# Altium PCB EEG_SHIELD.PcbDoc
Units mil, origin at the board's own origin, x right, y up, seen from the top; angles counter-clockwise.
Board outline 2700 x 2100 mil, 2 copper layers (Top Layer, Bottom Layer); 97 components, 89 nets, 307 pads, 0 vias.
Unrouted connection lines stored in the file: 215.
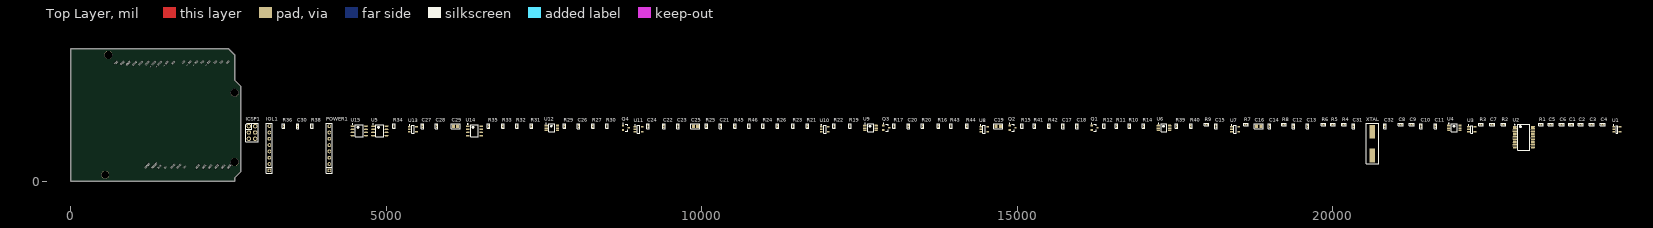
[diagram p0: Top Layer view]
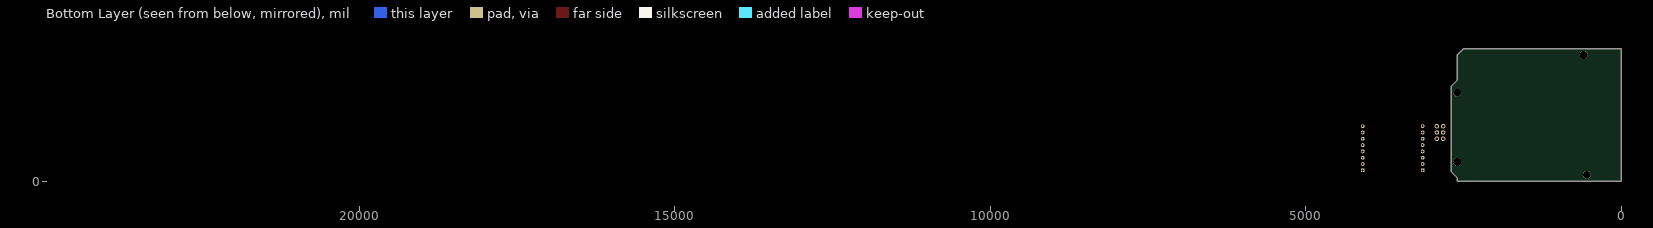
[diagram p1: Bottom Layer view, seen from below]

## Layer stack, top to bottom
Top Solder: solder mask 0.4, Solder Resist, Dk 3.5
Top Layer: signal copper 1.4
Dielectric1: dielectric 12.6, FR-4, Dk 4.8
Bottom Layer: signal copper 1.4
Bottom Solder: solder mask 0.4, Solder Resist, Dk 3.5

## Board outline
0,0 0,2100 2500,2100 2600,2000 2600,1600 2700,1500 2700,150 2600,50 2600,0

## Design rules (kind name [scope] priority, off if disabled: settings)
Clearance [All] p1: gap=10 ignorepadtopadclearanceinfootprint=FALSE except(0: Arc-Hole Track-Hole SMDPad-Hole THPad-Hole Via-Hole Fill-Hole Poly-Hole Region-Hole Text-Hole)
PolygonConnect [All] p1: connectstyle=Relief reliefconductorwidth=10 reliefentries=4 polygonreliefangle="90 Angle" airgapwidth=10
RoomDefinition SENSING [InComponentClass('SENSING')] p1: confinementstyle=ConfineOut formatcopy=TRUE lockcomponents=FALSE outline 2745,-35 3335,-35 3335,430 2745,430
RoutingVias [All] p1: holewidth=28 width=50 viastyle="Through Hole" minholewidth=28 minwidth=50 maxholewidth=28 maxwidth=50
SilkToSolderMaskClearance SilkscreenOverComponentPads [IsPad] p1: minsilkscreentomaskgap=10 clearancetoexposedcopper=TRUE
SolderMaskExpansion [All] p1: expansion=4
Width [All] p1: maxlimit=10 minlimit=10 preferedwidth=10
29 further rules are at their usual default settings.

## Components (designator, comment, footprint, x,y, rotation, side; value= is the part's Value field where it differs from the comment)
C1 "100nF" C0402 23775,895 r0 top
C2 "1uF" C0402 23925,895 r0 top
C3 "100nF" C0402 24100,895 r0 top
C4 "1uF" C0402 24275,895 r0 top
C5 "100nF" C0402 23450,895 r0 top
C6 "100nF" C0402 23625,895 r0 top
C7 "1uF" C0402 22525,895 r0 top
C8 "100nF" C0402 21075,895 r0 top
C9 "1uF" C0402 21250,895 r0 top
C10 "100nF" C0402 21400,870 r90 top
C11 "1uF" C0402 21625,870 r90 top
C12 "100nF" C0402 19375,870 r90 top
C13 "100nF" C0402 19600,870 r90 top
C14 "100nF" C0402 19000,870 r90 top
C15 "1uF" C0402 18150,870 r90 top
C16 "22uF" C0805 18825,870 r0 top
C17 "100nF" C0402 15725,870 r90 top
C18 "100nF" C0402 15950,870 r90 top
C19 "22uF" C0805 14700,870 r0 top
C20 "1uF" C0402 13275,870 r90 top
C21 "1uF" C0402 10300,870 r90 top
C22 "100nF" C0402 9400,870 r90 top
C23 "100nF" C0402 9625,870 r90 top
C24 "1uF" C0402 9150,870 r90 top
C25 "22uF" C0805 9900,870 r0 top
C26 "1uF" C0402 8050,870 r90 top
C27 "100nF" C0402 5575,870 r90 top
C28 "100nF" C0402 5800,870 r90 top
C29 "22uF" C0805 6100,870 r0 top
C30 "1uF" C0402 3600,870 r90 top
C31 "18pF" C0402 20325,870 r90 top
C32 "18pF" C0402 20825,870 r90 top
ICSP1 "ICSP" ICSP 2825,870 r0 top
IOL1 "IOL" "Header 8x1 8.5mm" 3150,170 r90 top
POWER1 "POWER_UNO" "Header 8x1 8.5mm" 4100,170 r90 top
Q1 "BSS138-7-F" SOT23-3 16225,845 r0 top
Q2 "BSS138-7-F" SOT23-3 14925,845 r0 top
Q3 "BSS138-7-F" SOT23-3 12925,845 r0 top
Q4 "BSS138-7-F" SOT23-3 8800,845 r0 top
R1 "100k" R0402 23300,895 r0 top
R2 "1k" R0402 22700,895 r0 top
R3 "100k" R0402 22350,895 r0 top
R4 "2k" R0402 20175,895 r0 top
R5 "330k" R0402 20000,895 r0 top
R6 "330k" R0402 19850,895 r0 top
R7 "1k" R0402 18625,895 r0 top
R8 "1M" R0402 19225,895 r0 top
R9 "100k" R0402 18000,895 r0 top
R10 "2k" R0402 16775,870 r90 top
R11 "330k" R0402 16575,870 r90 top
R12 "330k" R0402 16375,870 r90 top
R14 "1M" R0402 17000,870 r90 top
R15 "1M" R0402 15075,870 r90 top
R16 "1k" R0402 13750,870 r90 top
R17 "100k" R0402 13050,870 r90 top
R19 "2k" R0402 12350,870 r90 top
R20 "1M" R0402 13500,870 r90 top
R21 "330k" R0402 11675,870 r90 top
R22 "100k" R0402 12100,870 r90 top
R23 "330k" R0402 11450,870 r90 top
R24 "330k" R0402 10975,870 r90 top
R25 "100k" R0402 10075,870 r90 top
R26 "1M" R0402 11200,870 r90 top
R27 "1k" R0402 8275,870 r90 top
R29 "100k" R0402 7825,870 r90 top
R30 "1M" R0402 8500,870 r90 top
R31 "2k" R0402 7300,870 r90 top
R32 "330k" R0402 7075,870 r90 top
R33 "330k" R0402 6850,870 r90 top
R34 "100k" R0402 5125,870 r90 top
R35 "1M" R0402 6625,870 r90 top
R36 "100k" R0402 3375,870 r90 top
R38 "1M" R0402 3825,870 r90 top
R39 "10k" R0402 17525,870 r90 top
R40 "10k" R0402 17750,870 r90 top
R41 "10k" R0402 15275,870 r90 top
R42 "10k" R0402 15500,870 r90 top
R43 "10k" R0402 13950,870 r90 top
R44 "10k" R0402 14200,870 r90 top
R45 "10k" R0402 10525,870 r90 top
R46 "10k" R0402 10750,870 r90 top
U1 "NCP551SN30T1G" TSOP-5 24500,820 r0 top
U2 "MCP3912A1-E/SS" SSOP-28 23025,695 r0 top
U3 "NCP551SN30T1G" TSOP-5 22200,820 r0 top
U4 "AD8237ARMZ-R7" MSOP-8 21925,845 r0 top
U5 "LM7332MAX/NOPB" 8-SOIC 4900,795 r0 top
U6 "AD8237ARMZ-R7" MSOP-8 17325,845 r0 top
U7 "MCP6V31T-E/OT" SOT23-5 18450,820 r0 top
U8 "MCP6V31T-E/OT" SOT23-5 14475,820 r0 top
U9 "AD8237ARMZ-R7" MSOP-8 12675,845 r0 top
U10 "MCP6V31T-E/OT" SOT23-5 11950,820 r0 top
U11 "MCP6V31T-E/OT" SOT23-5 9000,820 r0 top
U12 "AD8237ARMZ-R7" MSOP-8 7625,845 r0 top
U13 "MCP6V31T-E/OT" SOT23-5 5425,820 r0 top
U14 "LM334MX/NOPB" 8-SOIC 6400,795 r0 top
U15 "MCP4011-103E/SN" 8-SOIC 4575,795 r0 top
XTAL "ABLS-4.000MHZ-B2-T" XTAL 20625,595 r90 top

## Footprints (in the part's own frame and the unit in brackets; to place one, negate y for a bottom-side part, rotate by r counter-clockwise, add the part's x,y. Pads: shape width x height; smd on the part's side, far side on the other; paste and mask are expansions set on the pad)
8-SOIC [mm] "SOIC, 8-Leads, Body 4.90x3.90mm, Pitch 1.27mm, IPC Medium Density"
  oval 1.5x0.6 smd: 1(-2.7,1.905) 2(-2.7,0.635) 3(-2.7,-0.635) 4(-2.7,-1.905) 5(2.7,-1.905) 6(2.7,-0.635) 7(2.7,0.635) 8(2.7,1.905)
  silkscreen extent -2.82,-2.45 1.55,2.88, body extent -3,-2.45 3,2.45, height 1.75
C0402 [mm] "Chip Capacitor, 2-Leads, Body 1.00x0.50mm, IPC Medium Density"
  rect 0.66x0.62 smd: 1(-0.44,0) 2(0.44,0)
  silkscreen extent -1,-0.5 1,0.5, body extent -0.53,-0.28 0.53,0.28, height 0.55
C0805 [mm] "Chip Capacitor, 2-Leads, Body 2.00x1.25mm, IPC Medium Density"
  rect 1.2x1.4 smd: 1(-0.85,0) 2(0.85,0)
  silkscreen extent -1.78,-0.98 1.82,1.02, body extent -1.05,-0.63 1.05,0.63, height 1.35
"Header 8x1 8.5mm" [mil] "Stackable 8 pin header"
  rect 60x60 hole 30: 1(0,0)
  round 60 hole 30: 2(100,0) 3(200,0) 4(300,0) 5(400,0) 6(500,0) 7(600,0) 8(700,0)
  silkscreen extent -50,-50 750,50, body extent -50,-50 750,50, height 335
ICSP [mil]
  round 70 hole 35.43: 1(0,0) 2(100,0) 3(0,-100) 4(100,-100) 5(0,-200) 6(100,-200)
  silkscreen extent -50,-250 150,50, body extent -50,-250 150,50, height 485
MSOP-8 [mm] "TSOP, 8-Leads, Body 3.00x3.00mm, Pitch 0.65mm, IPC Medium Density"
  oval 1.35x0.5 smd: 1(-2.275,0.975) 2(-2.275,0.325) 3(-2.275,-0.325) 4(-2.275,-0.975) 5(2.275,-0.975) 6(2.275,-0.325) 7(2.275,0.325) 8(2.275,0.975)
  silkscreen extent -2.4,-1.6 1.2,1.9, body extent -2.45,-1.6 2.45,1.6, height 1.1
R0402 [mm] "Chip Resistor, 2-Leads, Body 1.00x0.50mm, IPC Medium Density"
  rect 0.6x0.55 smd: 1(-0.425,0) 2(0.425,0)
  silkscreen extent -0.9,-0.5 0.9,0.5, body extent -0.53,-0.28 0.53,0.28, height 0.4
SOT23-3 [mm] "SOT23, 3-Leads, Body 2.90x2.35mm, Pitch 0.90mm, IPC Medium Density"
  rect 0.95x0.65 smd: 1(-1.175,0.9) 2(-1.175,-0.9) 3(1.175,0)
  silkscreen extent -1.3,-1.5 0.7,1.9, body extent -1.25,-1.5 1.25,1.5, height 1.1
SOT23-5 [mm] "SOT23, 5-Leads, Body 2.90x2.70mm, Pitch 0.95mm, IPC Medium Density"
  rect 1.05x0.6 smd: 1(-1.425,0.95) 2(-1.425,0) 3(-1.425,-0.95) 4(1.425,-0.95) 5(1.425,0.95)
  silkscreen extent -1.55,-1.55 0.5,1.92, body extent -1.6,-1.55 1.6,1.55, height 1.45
SSOP-28 [mm] "SOP, 28-Leads, Body 10.20x5.30mm, Pitch 0.65mm, IPC Medium Density"
  oval 1.65x0.5 smd: 1(-3.625,4.225) 2(-3.625,3.575) 3(-3.625,2.925) 4(-3.625,2.275) 5(-3.625,1.625) 6(-3.625,0.975) 7(-3.625,0.325) 8(-3.625,-0.325) 9(-3.625,-0.975) 10(-3.625,-1.625) 11(-3.625,-2.275) 12(-3.625,-2.925) 13(-3.625,-3.575) 14(-3.625,-4.225) 15(3.625,-4.225) 16(3.625,-3.575) 17(3.625,-2.925) 18(3.625,-2.275) 19(3.625,-1.625) 20(3.625,-0.975) 21(3.625,-0.325) 22(3.625,0.325) 23(3.625,0.975) 24(3.625,1.625) 25(3.625,2.275) 26(3.625,2.925) 27(3.625,3.575) 28(3.625,4.225)
  silkscreen extent -3.75,-5.25 2.4,5.25, body extent -3.9,-5.25 3.9,5.25, height 2
TSOP-5 [mm] "SOT23, 5-Leads, Body 3.00x2.75mm, Pitch 0.95mm, IPC Medium Density"
  rect 1.1x0.6 smd: 1(-1.3,0.95) 2(-1.3,0) 3(-1.3,-0.95) 4(1.3,-0.95) 5(1.3,0.95)
  silkscreen extent -1.42,-1.5 0.35,1.92, body extent -1.5,-1.5 1.5,1.5, height 1.1
XTAL [mm]
  rect 5.6x2.1 smd: 1(-4.75,0) 2(4.75,0)
  silkscreen extent -8.2,-2.5 8.2,2.5, body extent -6.35,-2.35 6.35,2.35, height 3.16

## Part data
C1 C3 C5 C6 C8 C10 C12 C13 C14 C17 C18 C22 C23 C27 C28: library part CL05A104MP5NNNC, "CAP CER 0.1uF 10V X5R 20% SMD 0402 85C Paper T/R", Case/Package=0402, Case Code (Metric)=1005, Dielectric=X5R, Manufacturer=Samsung, Max Operating Temperature=85°C, Min Operating Temperature=-55°C, Supplier Part Number 1=1276-1443-1-ND, Tolerance=20%, Voltage Rating=10V, Capacitance=100nF, Case Code (Imperial)=0402, ComponentLink1Description=https://media.digikey.com/pdf/Data%20Sheets/Samsung%20PDFs/CL_Series_MLCC_ds.pdf, ComponentLink1URL=https://media.digikey.com/pdf/Data%20Sheets/Samsung%20PDFs/CL_Series_MLCC_ds.pdf, Depth=0.5mm, Height=0.5mm, Lead Free="Lead Free", Length=1mm, Manufacturer Part Number=CL05A104MP5NNNC, Mount="Surface Mount", Packaging="Tape and Reel", Pricing 1="1=0.1, 10=0.024, 100=0.0106, 500=0.0076, 1000=0.006, 2500=0.0054, 5000=0.005 (USD)", Radiation Hardening=No, Stock 1=100000, Supplier 1=Digi-Key, Thickness=0.022inch, Voltage Rating (DC)=10V, Width=0.02inch
C2 C4 C7 C9 C11 C15 C20 C21 C24 C26 C30: library part CL05A105MP5NNNC, "CAP CER 1uF 10V X5R 20% SMD 0402 85C Paper T/R", Case/Package=0402, Case Code (Metric)=1005, Dielectric=X5R, Manufacturer=Samsung, Max Operating Temperature=85°C, Min Operating Temperature=-55°C, Package Quantity=1, Supplier Part Number 1=1276-1448-1-ND, Tolerance=20%, Voltage Rating=10V, Capacitance=1uF, Case Code (Imperial)=0402, ComponentLink1Description=https://media.digikey.com/pdf/Data%20Sheets/Samsung%20PDFs/CL_Series_MLCC_ds.pdf, ComponentLink1URL=https://media.digikey.com/pdf/Data%20Sheets/Samsung%20PDFs/CL_Series_MLCC_ds.pdf, Depth=0.5mm, Height=0.5mm, Lead Free="Lead Free", Length=1mm, Manufacturer Part Number=CL05A105MP5NNNC, Mount="Surface Mount", Packaging="Tape and Reel", Pricing 1="1=0.1, 10=0.031, 100=0.014, 500=0.01, 1000=0.0079, 2500=0.0072, 5000=0.0066 (USD)", Radiation Hardening=No, Stock 1=51298, Supplier 1=Digi-Key, Thickness=0.022inch, Voltage Rating (DC)=10V, Width=0.02inch
C16 C19 C25 C29: library part CL21A226KPCLRNC, "CAP CER 22uF 10V X5R 10% SMD 0805 85C Cardboard T/R", Case/Package=0805, Case Code (Metric)=2012, Dielectric=X5R, Manufacturer=Samsung, Max Operating Temperature=85°C, Min Operating Temperature=-55°C, Supplier Part Number 1=1276-6786-1-ND, Tolerance=10%, Voltage Rating=10V, Capacitance=22uF, Case Code (Imperial)=0805, ComponentLink1Description=https://www.verical.com/server-webapp/html/getDatasheet?partID=781772, ComponentLink1URL=https://www.verical.com/server-webapp/html/getDatasheet?partID=781772, Depth=1.25mm, Lead Free="Lead Free", Length=2mm, Manufacturer Part Number=CL21A226KPCLRNC, Mount="Surface Mount", Packaging="Tape and Reel", Pricing 1="1=0.38, 10=0.26, 100=0.1471, 500=0.1039, 1000=0.0909 (USD)", Radiation Hardening=No, Stock 1=40000, Supplier 1=Digi-Key, Thickness=0.037inch, Width=0.049inch
C31 C32: library part CL05C180JB5NNNC, "CAP CER 18pF 50V C0G 5% SMD 0402 125C Paper T/R", Case/Package=0402, Case Code (Metric)=1005, Dielectric=C0G, Manufacturer=Samsung, Max Operating Temperature=125°C, Min Operating Temperature=-55°C, Package Quantity=1, Supplier Part Number 1=1276-1140-1-ND, Temperature Coefficient=300ppm/°C, Tolerance=5%, Voltage=50V, Capacitance=18pF, Case Code (Imperial)=0402, ComponentLink1Description=https://www.verical.com/server-webapp/html/getDatasheet?partID=482699, ComponentLink1URL=https://www.verical.com/server-webapp/html/getDatasheet?partID=482699, ComponentLink2Description=https://www.distrelec.biz/Web/Downloads/_e/ng/MLCC_CatalogDownload2013_ENG.pdf?mime=application%2Fpdf, ComponentLink2URL=https://www.distrelec.biz/Web/Downloads/_e/ng/MLCC_CatalogDownload2013_ENG.pdf?mime=application%2Fpdf, ComponentLink3Description=https://produktinfo.conrad.com/datenblaetter/450000-474999/458675-da-01-en-VS_KONDENSATOR_0402.pdf, ComponentLink3URL=https://produktinfo.conrad.com/datenblaetter/450000-474999/458675-da-01-en-VS_KONDENSATOR_0402.pdf, Contact Plating=Tin, Depth=0.5mm, Height=0.5mm, Length=1mm, Manufacturer Part Number=CL05C180JB5NNNC, Material=Ceramic, Mount="Surface Mount", Packaging="Tape and Reel", Pricing 1="1=0.1, 10=0.033, 100=0.0148, 500=0.0105, 1000=0.0083, 2500=0.0075, 5000=0.0069 (USD)", Radiation Hardening=No, Stock 1=42154, Supplier 1=Digi-Key, Thickness=0.022inch, Voltage Rating=50V, Width=0.02inch
ICSP1: Supplier Part Number 1=2699117, Supplier 1=Arrow, Supplier 2=Arrow, Supplier 3=Digi-Key, Supplier 4=Arrow, Supplier 5=Digi-Key, Supplier Part Number 2=2699116, Supplier Part Number 3=SAM1185-06-ND, Supplier Part Number 4=2699091, Supplier Part Number 5=SAM1196-06-ND
IOL1 POWER1: Supplier Part Number 1=SAM1198-08-ND, Supplier 1=Digi-Key, Supplier 2=Arrow, Supplier 3=Arrow, Supplier 4=Arrow, Supplier Part Number 2=2698939, Supplier Part Number 3=2698940, Supplier Part Number 4=2698925
Q1 Q2 Q3 Q4: "MOSFET N-CH 50V 200MA SOT23-3", Case/Package=SOT-23, Continuous Drain Current (ID)=200mA, Current=2A, Drain to Source Breakdown Voltage=50V, Drain to Source Resistance=3.5R, Gate to Source Voltage (Vgs)=20V, Input Capacitance=50pF, Manufacturer=Diodes, Max Operating Temperature=150°C, Max Power Dissipation=300mW, Min Operating Temperature=-55°C, Package Quantity=3000, Supplier Part Number 1=BSS138-FDICT-ND, Threshold Voltage=1.2V, ComponentLink1Description=http://www.diodes.com/datasheets/BSS138.pdf, ComponentLink1URL=http://www.diodes.com/datasheets/BSS138.pdf, ComponentLink2Description=http://www.farnell.com/datasheets/1915619.pdf, ComponentLink2URL=http://www.farnell.com/datasheets/1915619.pdf, ComponentLink3Description=https://www.diodes.com/assets/Datasheets/ds30144.pdf, ComponentLink3URL=https://www.diodes.com/assets/Datasheets/ds30144.pdf, ComponentLink4Description=http://www.diodes.com/_files/datasheets/ds30144.pdf, ComponentLink4URL=http://www.diodes.com/_files/datasheets/ds30144.pdf, Contact Plating=Matte,Tin, Current Rating=200mA, Drain to Source Voltage (Vdss)=50V, Element Configuration=Single, Fall Time=25ns, Height=1mm, Lead Free="Lead Free", Length=2.9mm, Manufacturer Part Number=BSS138-7-F, Mount="Surface Mount", Nominal Vgs=1.2V, Number of Channels=1, Number of Elements=1, Number of Pins=3, On-State Resistance=3.5R, Packaging="Tape and Reel", Power Dissipation=300mW, Pricing 1="1=0.23, 10=0.212, 100=0.119, 500=0.0637, 1000=0.0433 (USD)", Rds On Max=3.5R, REACH SVHC="No SVHC", Rise Time=10ns, Stock 1=6200, Supplier 1=Digi-Key, Turn-Off Delay Time=20ns, Turn-On Delay Time=20ns, Voltage=50V, Voltage Rating (DC)=50V, Weight=0.000282oz, Width=1.3mm
R1 R3 R9 R17 R22 R25 R29 R34 R36: library part RC0402FR-07100KL, "RES SMD 100K OHM 1% 1/16W 0402", Case/Package=0402, Case Code (Metric)=1005, Manufacturer=Yageo, Max Operating Temperature=155°C, Max Power Dissipation=63mW, Min Operating Temperature=-55°C, Package Quantity=1, Resistance=100kR, Supplier Part Number 1=311-100KLRCT-ND, Temperature Coefficient=100ppm/°C, Tolerance=1%, Voltage Rating=50V, Case Code (Imperial)=0402, ComponentLink1Description=http://www.yageo.com/documents/recent/PYu-RC_Group_51_RoHS_L_9.pdf, ComponentLink1URL=http://www.yageo.com/documents/recent/PYu-RC_Group_51_RoHS_L_9.pdf, ComponentLink2Description=http://www.farnell.com/datasheets/1018594.pdf, ComponentLink2URL=http://www.farnell.com/datasheets/1018594.pdf, ComponentLink3Description=http://www.yageo.com/documents/recent/PYu-RC_Group_51_RoHS_L_8.pdf, ComponentLink3URL=http://www.yageo.com/documents/recent/PYu-RC_Group_51_RoHS_L_8.pdf, ComponentLink4Description=http://documents.rs-components.com/techlib://itc_doclist_GB.htm?stockno=6185797, ComponentLink4URL=http://documents.rs-components.com/techlib://itc_doclist_GB.htm?stockno=6185797, Composition="Thick Film", Depth=0.5mm, Features="Moisture Resistant", Height=0.016inch, Lead Free="Lead Free", Length=0.039inch, Manufacturer Part Number=RC0402FR-07100KL, Military Standard=Not, Number of Terminations=2, Packaging="Tape and Reel", Power Rating=63mW, Pricing 1="1=0.1, 10=0.018, 100=0.0073, 1000=0.0033, 2500=0.0029, 5000=0.0024 (USD)", REACH SVHC="No SVHC", Stock 1=16311362, Supplier 1=Digi-Key, Termination=SMD/SMT, Width=0.02inch, Working Voltage=50V
R2 R7 R16 R27: library part RC0402FR-071KL, "RES SMD 1K OHM 1% 1/16W 0402", Case/Package=0402, Case Code (Metric)=1005, Manufacturer=Yageo, Max Operating Temperature=155°C, Min Operating Temperature=-55°C, Power Rating=62.5mW, Resistance=1kR, Supplier Part Number 1=311-1.00KLRCT-ND, Temperature Coefficient=100ppm/°C, Tolerance=1%, Voltage Rating=50V, Case Code (Imperial)=0402, ComponentLink1Description=http://documents.rs-components.com/techlib://itc_doclist_GB.htm?stockno=6186122, ComponentLink1URL=http://documents.rs-components.com/techlib://itc_doclist_GB.htm?stockno=6186122, ComponentLink2Description=http://www.mouser.com/ds/2/447/PYu-RC0402_51_RoHS_L_6_r-8721.pdf, ComponentLink2URL=http://www.mouser.com/ds/2/447/PYu-RC0402_51_RoHS_L_6_r-8721.pdf, ComponentLink3Description=http://www.yageo.com/documents/recent/PYu-RC0402_51_RoHS_L_6_r.pdf, ComponentLink3URL=http://www.yageo.com/documents/recent/PYu-RC0402_51_RoHS_L_6_r.pdf, ComponentLink4Description=http://www.farnell.com/datasheets/1018594.pdf, ComponentLink4URL=http://www.farnell.com/datasheets/1018594.pdf, Composition="Thick Film", Depth=0.5mm, Height=0.32mm, Lead Free="Lead Free", Length=1mm, Manufacturer Part Number=RC0402FR-071KL, Military Standard=Not, Number of Pins=2, Packaging="Tape and Reel", Pricing 1="1=0.1, 10=0.018, 100=0.0073, 1000=0.0033, 2500=0.0029, 5000=0.0024 (USD)", REACH SVHC=Unknown, Stock 1=121806164, Supplier 1=Digi-Key, Termination=SMD/SMT, Voltage Rating (DC)=50V, Width=0.5mm
R4 R10 R19 R31: library part RC0402FR-072KL, "RES SMD 2K OHM 1% 1/16W 0402", Case/Package=0402, Case Code (Metric)=1005, Manufacturer=Yageo, Max Operating Temperature=155°C, Max Power Dissipation=63mW, Min Operating Temperature=-55°C, Package Quantity=1, Resistance=2kR, Supplier Part Number 1=311-2KLRCT-ND, Temperature Coefficient=100ppm/°C, Tolerance=1%, Voltage Rating=50V, Case Code (Imperial)=0402, ComponentLink1Description=http://www.yageo.com/documents/recent/PYu-RC_Group_51_RoHS_L_9.pdf, ComponentLink1URL=http://www.yageo.com/documents/recent/PYu-RC_Group_51_RoHS_L_9.pdf, ComponentLink2Description=http://documents.rs-components.com/techlib://itc_doclist_GB.htm?stockno=6186510, ComponentLink2URL=http://documents.rs-components.com/techlib://itc_doclist_GB.htm?stockno=6186510, ComponentLink3Description=https://www.verical.com/server-webapp/html/getDatasheet?partID=358921, ComponentLink3URL=https://www.verical.com/server-webapp/html/getDatasheet?partID=358921, ComponentLink4Description=http://www.mouser.com/ds/2/447/PYu-RC0402_51_RoHS_L_6_r-8721.pdf, ComponentLink4URL=http://www.mouser.com/ds/2/447/PYu-RC0402_51_RoHS_L_6_r-8721.pdf, ComponentLink5Description=http://www.farnell.com/datasheets/1018594.pdf, ComponentLink5URL=http://www.farnell.com/datasheets/1018594.pdf, ComponentLink6Description=http://www.farnell.com/datasheets/2167052.pdf, ComponentLink6URL=http://www.farnell.com/datasheets/2167052.pdf, Composition="Thick Film", Depth=0.5mm, Features="Moisture Resistant", Height=0.016inch, Lead Free="Lead Free", Length=1mm, Manufacturer Part Number=RC0402FR-072KL, Military Standard=Not, Number of Terminations=2, Packaging="Tape and Reel", Power Rating=63mW, Pricing 1="1=0.1, 10=0.018, 100=0.0073, 1000=0.0033, 2500=0.0029, 5000=0.0024 (USD)", REACH SVHC=Unknown, Stock 1=11965319, Supplier 1=Digi-Key, Termination=SMD/SMT, Voltage Rating (DC)=50V, Width=0.02inch, Working Voltage=50V
R5 R6 R11 R12 R21 R23 R24 R32 R33: library part RC0402FR-07330KL, "RES SMD 330K OHM 1% 1/16W 0402", Case/Package=0402, Case Code (Metric)=1005, Manufacturer=Yageo, Max Operating Temperature=155°C, Max Power Dissipation=63mW, Min Operating Temperature=-55°C, Package Quantity=1, Resistance=330kR, Supplier Part Number 1=311-330KLRCT-ND, Temperature Coefficient=100ppm/°C, Tolerance=1%, Voltage Rating=50V, Case Code (Imperial)=0402, ComponentLink1Description=http://www.yageo.com/documents/recent/PYu-RC_Group_51_RoHS_L_9.pdf, ComponentLink1URL=http://www.yageo.com/documents/recent/PYu-RC_Group_51_RoHS_L_9.pdf, ComponentLink2Description=http://www.mouser.com/ds/2/447/PYu-RC0402_51_RoHS_L_6_r-8721.pdf, ComponentLink2URL=http://www.mouser.com/ds/2/447/PYu-RC0402_51_RoHS_L_6_r-8721.pdf, ComponentLink3Description=http://www.farnell.com/datasheets/1018594.pdf, ComponentLink3URL=http://www.farnell.com/datasheets/1018594.pdf, ComponentLink4Description=http://www.yageo.com/documents/recent/PYu-RC0402_51_RoHS_L_6_r.pdf, ComponentLink4URL=http://www.yageo.com/documents/recent/PYu-RC0402_51_RoHS_L_6_r.pdf, Composition="Thick Film", Depth=0.5mm, Features="Moisture Resistant", Height=0.016inch, Lead Free="Lead Free", Length=1mm, Manufacturer Part Number=RC0402FR-07330KL, Military Standard=Not, Number of Terminations=2, Packaging="Tape and Reel", Power Rating=63mW, Pricing 1="1=0.1, 10=0.018, 100=0.0073, 1000=0.0033, 2500=0.0029, 5000=0.0024 (USD)", REACH SVHC=Unknown, Stock 1=1854774, Supplier 1=Digi-Key, Termination=SMD/SMT, Width=0.02inch
R8 R14 R15 R20 R26 R30 R35 R38: library part RC0402FR-071ML, "RES SMD 1M OHM 1% 1/16W 0402", Case/Package=0402, Case Code (Metric)=1005, Manufacturer=Yageo, Max Operating Temperature=155°C, Min Operating Temperature=-55°C, Power Rating=63mW, Resistance=1MR, Supplier Part Number 1=311-1.00MLRCT-ND, Temperature Coefficient=100ppm/°C, Tolerance=1%, Voltage Rating=50V, Case Code (Imperial)=0402, ComponentLink1Description=http://www.farnell.com/datasheets/1018594.pdf, ComponentLink1URL=http://www.farnell.com/datasheets/1018594.pdf, ComponentLink2Description=http://www.yageo.com/documents/recent/PYu-RC0402_51_RoHS_L_6_r.pdf, ComponentLink2URL=http://www.yageo.com/documents/recent/PYu-RC0402_51_RoHS_L_6_r.pdf, Composition="Thick Film", Depth=0.5mm, Height=0.32mm, Lead Free="Lead Free", Length=1mm, Manufacturer Part Number=RC0402FR-071ML, Military Standard=Not, Packaging="Tape and Reel", Pricing 1="1=0.1, 10=0.018, 100=0.0073, 1000=0.0033, 2500=0.0029, 5000=0.0024 (USD)", REACH SVHC=Unknown, Stock 1=18919667, Supplier 1=Digi-Key, Termination=SMD/SMT
R39 R40 R41 R42 R43 R44 R45 R46: library part RC0402JR-0710KL, "RES SMD 10K OHM 5% 1/16W 0402", Case/Package=0402, Case Code (Metric)=1005, Manufacturer=Yageo, Max Operating Temperature=155°C, Max Power Dissipation=63mW, Min Operating Temperature=-55°C, Package Quantity=1, Power Rating=62.5mW, Resistance=10kR, Supplier Part Number 1=311-10KJRCT-ND, Temperature Coefficient=100ppm/°C, Tolerance=5%, Voltage Rating=50V, Case Code (Imperial)=0402, Composition="Thick Film", Depth=0.5mm, Features="Moisture Resistant", Height=0.016inch, Lead Free="Lead Free", Length=1mm, Manufacturer Part Number=RC0402JR-0710KL, Military Standard=Not, Number of Terminations=2, Packaging="Tape and Reel", Pricing 1="1=0.1, 10=0.018, 100=0.0073, 1000=0.0033, 2500=0.0029, 5000=0.0024 (USD)", REACH SVHC=Unknown, Stock 1=47303622, Supplier 1=Digi-Key, Termination=SMD/SMT, Width=0.02inch
U1 U3: "LDO 3.0V 150mA CMOS w/Enable", Case/Package=TSOP, Dropout Voltage=40mV, Input Bias Current=4uA, Manufacturer="ON Semiconductor", Max Input Voltage=12V, Max Operating Temperature=85°C, Max Output Current=150mA, Min Input Voltage=0uV, Min Operating Temperature=-40°C, Min Output Voltage=3V, Output Voltage Accuracy=2%, Package Quantity=1, Quiescent Current=8uA, Supplier Part Number 1=NCP551SN30T1GOSCT-ND, Accuracy=2%, ComponentLink1Description=http://www.onsemi.ru.com/pub/Collateral/NCP551-D.PDF, ComponentLink1URL=http://www.onsemi.ru.com/pub/Collateral/NCP551-D.PDF, ComponentLink2Description=http://www.onsemi.com/pub/Collateral/NCP551-D.PDF, ComponentLink2URL=http://www.onsemi.com/pub/Collateral/NCP551-D.PDF, Contact Plating=Matte,Tin, Halogen Free="Halogen Free", Height=1mm, Lead Free="Lead Free", Length=3mm, Manufacturer Part Number=NCP551SN30T1G, Mount="Surface Mount", Nominal Output Voltage=3V, Number of Outputs=1, Number of Pins=5, Number of Regulators=1, Output Current=150mA, Output Type=Fixed, Output Voltage=3V, Packaging="Tape and Reel", Polarity=Positive, Pricing 1="1=0.54, 10=0.46, 100=0.3432, 500=0.2697, 1000=0.2084 (USD)", Radiation Hardening=No, REACH SVHC="No SVHC", Stock 1=9920, Supplier 1=Digi-Key, Width=1.5mm
U2: "IC Analog Front End - AFE 4 Chnl Energy Meter Front End 3V SPI/2", Case/Package=SSOP, Manufacturer=Microchip, Max Operating Temperature=125°C, Max Supply Voltage=3.6V, Min Operating Temperature=-40°C, Min Supply Voltage=2.7V, Package Quantity=47, Supplier Part Number 1=MCP3912A1-E/SS-ND, Height=1.85mm, Interface=Serial,SPI, Lead Free="Lead Free", Length=10.5mm, Manufacturer Part Number=MCP3912A1-E/SS, Mount="Surface Mount", Number of A/D Converters=4, Number of Channels=4, Number of Pins=28, Packaging=Rail/Tube, Pricing 1="1=3.33, 25=2.7708, 100=2.5235 (USD)", REACH SVHC="No SVHC", Resolution=24b, Sampling Rate=125KS/s, Stock 1=156, Supplier 1=Digi-Key, Width=5.6mm
U4 U6 U9 U12: "IC OPAMP INSTR 200KHZ RRO 8MSOP", Case/Package=MSOP, Input Bias Current=250pA, Input Offset Voltage (Vos)=75uV, Manufacturer="Analog Devices", Max Operating Temperature=125°C, Max Supply Voltage=5.5V, Min Operating Temperature=-40°C, Min Supply Voltage=1.8V, Nominal Supply Current=115uA, Output Current per Channel=4mA, Package Quantity=1, Supplier Part Number 1=AD8237ARMZ-R7CT-ND, Voltage Gain=60dB, -3db Bandwidth=200kHz, Bandwidth=20kHz, Common Mode Rejection Ratio=106dB, ComponentLink1Description=http://www.analog.com/media/en/technical-documentation/data-sheets/AD8237.pdf, ComponentLink1URL=http://www.analog.com/media/en/technical-documentation/data-sheets/AD8237.pdf, ComponentLink2Description=http://www.analog.com/static/imported-files/data_sheets/AD8237.pdf, ComponentLink2URL=http://www.analog.com/static/imported-files/data_sheets/AD8237.pdf, Contact Plating=Matte,Tin, Lead Free="Contains Lead", Manufacturer Part Number=AD8237ARMZ-R7, Mount="Surface Mount", Number of Channels=1, Number of Circuits=1, Number of Elements=1, Number of Pins=8, Operating Supply Current=115uA, Packaging="Tape and Reel", Pricing 1="1=2.76, 10=2.476, 100=2.0286, 500=1.7269 (USD)", Slew Rate=0.15V/µs, Stock 1=16545, Supplier 1=Digi-Key
U5: "IC OP AMP R-R I/O DUAL 30V 8SOIC", Case/Package=SOIC, Input Bias Current=1uA, Input Offset Voltage (Vos)=2mV, Manufacturer="TI National Semiconductor", Max Dual Supply Voltage=16V, Max Operating Temperature=125°C, Max Supply Voltage=32V, Min Dual Supply Voltage=1.25V, Min Operating Temperature=-40°C, Min Supply Voltage=2.5V, Nominal Supply Current=2mA, Output Current=70mA, Package Quantity=2500, Power Supply Rejection Ratio (PSRR)=78dB, Supplier Part Number 1=296-35310-1-ND, Voltage Gain=77dB, Common Mode Rejection Ratio=62dB, ComponentLink1Description=http://www.ti.com/lit/ds/symlink/lm7332.pdf, ComponentLink1URL=http://www.ti.com/lit/ds/symlink/lm7332.pdf, Contact Plating=Tin, Gain Bandwidth Product=21MHz, Lead Free="Lead Free", Manufacturer Part Number=LM7332MAX/NOPB, Mount="Surface Mount", Number of Channels=2, Number of Circuits=2, Number of Elements=2, Number of Pins=8, Operating Supply Current=2mA, Operating Supply Voltage=16V, Output Current per Channel=70mA, Packaging="Tape and Reel", Pricing 1="1=2.67, 10=2.402, 100=1.9306, 500=1.5862, 1000=1.3143 (USD)", Radiation Hardening=No, Slew Rate=15.2V/µs, Stock 1=7321, Supplier 1=Digi-Key, Unity Gain Bandwidth Product=19.3MHz
U7 U8 U10 U11 U13: "IC OPAMP ZRO-DRFT 300KHZ SOT23-5", Case/Package=SOT-23, Input Bias Current=5pA, Input Offset Voltage (Vos)=8uV, Manufacturer=Microchip, Max Operating Temperature=125°C, Max Supply Voltage=5.5V, Min Operating Temperature=-40°C, Min Supply Voltage=1.8V, Nominal Supply Current=23uA, Output Current=21mA, Package Quantity=3000, Power Supply Rejection Ratio (PSRR)=120dB, Supplier Part Number 1=MCP6V31T-E/OTCT-ND, Voltage Gain=135dB, Bandwidth=300kHz, Common Mode Rejection Ratio=120dB, ComponentLink1Description=http://ww1.microchip.com/downloads/en/DeviceDoc/25127A.pdf, ComponentLink1URL=http://ww1.microchip.com/downloads/en/DeviceDoc/25127A.pdf, ComponentLink2Description=https://www.distrelec.biz/Web/Downloads/_t/ds/MCP6V31_1U_eng_tds.pdf?mime=application%2Fpdf, ComponentLink2URL=https://www.distrelec.biz/Web/Downloads/_t/ds/MCP6V31_1U_eng_tds.pdf?mime=application%2Fpdf, ComponentLink3Description=https://www.verical.com/server-webapp/html/getDatasheet?partID=762349, ComponentLink3URL=https://www.verical.com/server-webapp/html/getDatasheet?partID=762349, ComponentLink4Description=http://ww1.microchip.com/downloads/jp/DeviceDoc/jp557758.pdf, ComponentLink4URL=http://ww1.microchip.com/downloads/jp/DeviceDoc/jp557758.pdf, ComponentLink5Description=http://www.microchip.com/mymicrochip/filehandler.aspx?ddocname=en557758, ComponentLink5URL=http://www.microchip.com/mymicrochip/filehandler.aspx?ddocname=en557758, ComponentLink6Description=http://www.farnell.com/datasheets/1599560.pdf, ComponentLink6URL=http://www.farnell.com/datasheets/1599560.pdf, Gain Bandwidth Product=300kHz, Height=1.3mm, Lead Free="Lead Free", Length=3.1mm, Manufacturer Part Number=MCP6V31T-E/OT, Number of Amplifiers=1, Number of Channels=1, Number of Circuits=1, Number of Elements=1, Number of Pins=5, Operating Supply Current=23uA, Output Current per Channel=21mA, Packaging="Tape and Reel", Pricing 1="1=1.11, 25=0.9272, 100=0.8446 (USD)", Radiation Hardening=No, REACH SVHC="No SVHC", Slew Rate=0.13V/µs, Stock 1=12497, Supplier 1=Digi-Key, Unity Gain Bandwidth Product=300kHz, Width=1.8mm
U14: "IC CURRENT SOURCE 3% 8SOIC", Case/Package=SOIC, Forward Current=5mA, Forward Voltage=1V, Manufacturer="TI National Semiconductor", Max Input Voltage=40V, Max Operating Temperature=85°C, Max Power Dissipation=400mW, Max Supply Current=10mA, Min Operating Temperature=-40°C, Min Supply Voltage=800mV, Output Voltage=20V, Package Quantity=2500, Quiescent Current=1uA, Supplier Part Number 1=LM334MX/NOPBCT-ND, Accuracy=6%, ComponentLink1Description=https://www.verical.com/server-webapp/html/getDatasheet?partID=629166, ComponentLink1URL=https://www.verical.com/server-webapp/html/getDatasheet?partID=629166, ComponentLink2Description=http://www.ti.com/lit/ds/symlink/lm234.pdf, ComponentLink2URL=http://www.ti.com/lit/ds/symlink/lm234.pdf, ComponentLink3Description=http://www.ti.com/general/docs/lit/getliterature.tsp?genericPartNumber=LM334&&fileType=pdf, ComponentLink3URL=http://www.ti.com/general/docs/lit/getliterature.tsp?genericPartNumber=LM334&&fileType=pdf, ComponentLink4Description=http://www.farnell.com/datasheets/1883087.pdf, ComponentLink4URL=http://www.farnell.com/datasheets/1883087.pdf, Lead Free="Lead Free", Manufacturer Part Number=LM334MX/NOPB, Max Supply Voltage=40V, Min Input Voltage=1V, Mount="Surface Mount", Number of Outputs=1, Number of Pins=8, Output Current=10mA, Output Type=Analog, Packaging="Tape and Reel", Pricing 1="1=0.9, 10=0.802, 100=0.6254, 500=0.5166, 1000=0.4079 (USD)", Radiation Hardening=No, REACH SVHC="No SVHC", Reference Type=Adjustable, Stock 1=58254, Supplier 1=Digi-Key
U15: "IC 10K Digital Potentiometer Single, 2 Wire, Serial,  20%, 1.8 V", Case/Package=SOIC, Manufacturer=Microchip, Max Operating Temperature=125°C, Max Supply Current=45uA, Max Supply Voltage=5.5V, Min Operating Temperature=-40°C, Min Supply Voltage=1.8V, Operating Supply Voltage=5V, Package Quantity=100, Resistance=10kR, Supplier Part Number 1=MCP4011-103E/SN-ND, Temperature Coefficient=150ppm/°C, Tolerance=20%, ComponentLink1Description=http://ww1.microchip.com/downloads/en/DeviceDoc/21978c.pdf, ComponentLink1URL=http://ww1.microchip.com/downloads/en/DeviceDoc/21978c.pdf, ComponentLink2Description=https://www.verical.com/server-webapp/html/getDatasheet?partID=431510, ComponentLink2URL=https://www.verical.com/server-webapp/html/getDatasheet?partID=431510, ComponentLink3Description=http://www.microchip.com/mymicrochip/filehandler.aspx?ddocname=en025230, ComponentLink3URL=http://www.microchip.com/mymicrochip/filehandler.aspx?ddocname=en025230, ComponentLink4Description=http://www.microchip.com/mymicrochip/filehandler.aspx?ddocname=en023833, ComponentLink4URL=http://www.microchip.com/mymicrochip/filehandler.aspx?ddocname=en023833, ComponentLink5Description=https://www.distrelec.biz/Web/Downloads/_t/ds/mcp4011_eng_tds.pdf?mime=application%2Fpdf, ComponentLink5URL=https://www.distrelec.biz/Web/Downloads/_t/ds/mcp4011_eng_tds.pdf?mime=application%2Fpdf, ComponentLink6Description=http://www.farnell.com/datasheets/130143.pdf, ComponentLink6URL=http://www.farnell.com/datasheets/130143.pdf, Contact Plating=Matte,Tin, Height=1.55mm, Interface=2-Wire,Serial, Lead Free="Lead Free", Length=5mm, Manufacturer Part Number=MCP4011-103E/SN, Memory Type=Volatile, Mount="Surface Mount", Nominal Supply Current=45uA, Number of Circuits=1, Number of Elements=1, Number of Pins=8, Number of Positions=64, Number of Taps=64, Packaging=Rail/Tube, Pricing 1="1=0.53, 25=0.4428, 100=0.4017 (USD)", Radiation Hardening=No, REACH SVHC="No SVHC", Stock 1=1448, Supplier 1=Digi-Key, Taper=Linear, Width=3.99mm
XTAL: "4MHz ±20ppm Crystal 18pF 180 Ohm -20°C ~ 70°C  Surface Mount HC49/US", Case/Package=SMD/SMT, ESR (Equivalent Series Resistance)=180R, Frequency=4MHz, Frequency Stability=50ppm, Frequency Tolerance=20ppm, Load Capacitance=18pF, Manufacturer=Abracon, Max Operating Temperature=70°C, Min Operating Temperature=-20°C, Package Quantity=1000, Supplier Part Number 1=535-9085-1-ND, ComponentLink1Description=https://abracon.com/Support/PackageDrawing/Resonators/ABLS-2D.pdf, ComponentLink1URL=https://abracon.com/Support/PackageDrawing/Resonators/ABLS-2D.pdf, ComponentLink2Description=http://www.abracon.com/Resonators/abls.pdf, ComponentLink2URL=http://www.abracon.com/Resonators/abls.pdf, ComponentLink3Description=https://www.verical.com/server-webapp/html/getDatasheet?partID=722412, ComponentLink3URL=https://www.verical.com/server-webapp/html/getDatasheet?partID=722412, ComponentLink4Description=http://www.mouser.com/ds/2/3/abls-44621.pdf, ComponentLink4URL=http://www.mouser.com/ds/2/3/abls-44621.pdf, Depth=4.7mm, Height=0.165inch, Lead Free="Lead Free", Length=11.4mm, Manufacturer Part Number=ABLS-4.000MHZ-B2-T, Mount="Surface Mount", Number of Pins=2, Packaging="Tape and Reel", Pricing 1="1=0.28, 10=0.234, 50=0.2104, 100=0.187, 500=0.1777 (USD)", Radiation Hardening=No, REACH SVHC=Yes, Series Resistance=180R, Stock 1=74308, Supplier 1=Digi-Key, Termination=SMD/SMT, Tolerance=20ppm, Width=0.185inch

## Free pads (board coordinates)
  round 125.98 hole 125.98: 0(550,100) 0(600,2000) 0(2600,300) 0(2600,1400)

## Nets (pads, with @x,y where several pads share a name; then routed paths per layer and width w, separated by ;. In a path a pad name is that pad's centre, name@x,y a point inside that pad or via, vN(x,y) a via of type N, cw(c..) or ccw(c..) an arc to the next point about the centre after c; other vN are vias at no path point)
0_IN+: R5.2 U4.2
0_IN-: R6.2 U4.3
1_IN+: R11.2 U6.2
1_IN-: R12.2 U6.3
2_IN+: R21.2 U9.2
2_IN-: R23.2 U9.3
3_IN+: R32.2 U12.2
3_IN-: R33.2 U12.3
3V3: POWER1.5
5V: ICSP1.2 POWER1.4
+3V: C6.2 C10.2 C11.2 Q1.1 Q2.1 Q3.1 Q4.1 R1.2 R39.2 R41.2 R43.2 R45.2 U2.28 U3.4
+3VA: C3.2 C4.2 C5.2 C12.2 C13.2 C17.2 C18.2 C22.2 C23.2 C27.2 C28.2 R22.2 R34.2 U1.4 U2.1 U4.1 U4.5 U5.8 U6.1 U6.5 U7.5 U8.5 U9.1 U9.5 U10.5 U11.5 U12.1 U12.5 U13.5
+5V: C1.2 C2.2 C8.2 C9.2 R40.2 R42.2 R44.2 R46.2 U1.1 U1.3 U3.1 U3.3 U14.4 U15.1
AD0: 
AD1: 
AD2: 
AD3: 
AD4: 
AD5: 
AGND: C1.1 C2.1 C3.1 C4.1 C5.1 C7.1 C12.1 C13.1 C14.1 C15.1 C17.1 C18.1 C20.1 C21.1 C22.1 C23.1 C26.1 C27.1 C28.1 C30.1 R25.1 R36.1 U1.2 U2.10 U2.11 U2.12 U2.13 U2.15 U2.16 U2.19 U4.4 U5.4 U6.4 U7.2 U8.2 U9.4 U10.2 U11.2 U12.4 U13.2
AREF: 
CH0+: C7.2 R2.2 U2.2
CH1+: C15.2 R7.2 U2.5
CH2+: C20.2 R16.2 U2.6
CH3+: C26.2 R27.2 U2.9
CS_3V: Q4.3 R45.1 U2.23
CS_5V: R46.1
CURRENT_BIAS: R5.1 R6.1 R11.1 R12.1 R21.1 R23.1 R32.1 R33.1 U5.1 U5.2
DRIVEN_GND: C24.2 R24.1
GND: C6.1 C8.1 C9.1 C10.1 C11.1 C31.1 C32.1 ICSP1.6 POWER1.2 POWER1.3 U2.17 U2.20 U3.2 U15.2
IO0: IOL1.1
IO1: IOL1.2
IO2: IOL1.3
IO3: IOL1.4
IO4: IOL1.5
IO5: IOL1.6
IO6: IOL1.7
IO7: IOL1.8
IO8: 
IO9: 
IO10: 
IO11: 
IO12: 
IO13: 
IOREF: POWER1.7
MISO: ICSP1.1
MISO_3V: Q2.3 R41.1 U2.25
MISO_5V: R42.1
MOSI: ICSP1.4
MOSI_3V: Q1.3 R39.1 U2.26
MOSI_5V: R40.1
NetC14_2: C14.2 U2.14 U5.5
NetC16_2: C16.2 R8.2 U7.1
NetC19_2: C19.2 R15.2 U8.1
NetC21_2: C21.2 R22.1 R25.2 U10.1
NetC24_1: C24.1 R24.2 U10.3 U10.4
NetC25_2: C25.2 R26.2 U11.1
NetC29_2: C29.2 R35.2 U13.1
NetC30_2: C30.2 R34.1 R36.2 U5.3
NetC31_2: C31.2 U2.21 XTAL.1
NetC32_2: C32.2 U2.22 XTAL.2
NetR1_1: R1.1 U2.27
NetR3_1: R3.1 R4.2 U4.7
NetR9_1: R9.1 R10.2 U6.7
NetR14_1: R14.1 U7.3
NetR17_1: R17.1 R19.2 U9.7
NetR20_1: R20.1 U8.3
NetR29_1: R29.1 R31.2 U12.7
NetR30_1: R30.1 U11.3
NetR38_1: R38.1 U13.3
NetU14_1: U14.1 U15.3
NetU14_2: U14.2 U14.3 U14.6 U14.7 U15.4
REF_0: C16.1 R8.1 U4.6 U7.4
REF_1: C19.1 R15.1 U6.6 U8.4
REF_2: C25.1 R26.1 U9.6 U11.4
REF_3: C29.1 R35.1 U12.6 U13.4
RESET: ICSP1.5 POWER1.6
SCK: ICSP1.3
SCK_3V: Q3.3 R43.1 U2.24
SCK_5V: R44.1
SCL: 
SDA: 
V_REF: R4.1 R10.1 R19.1 R31.1 U2.3 U2.4 U5.6 U5.7
VIN: POWER1.1
VOUT_0: R2.1 R3.2 R14.2 U4.8
VOUT_1: R7.1 R9.2 R20.2 U6.8
VOUT_2: R16.1 R17.2 R30.2 U9.8
VOUT_3: R27.1 R29.2 R38.2 U12.8
VREF: U2.7 U2.8
pads on no net: POWER1.8 Q1.2 Q2.2 Q3.2 Q4.2 U1.5 U2.18 U3.5 U14.5 U14.8 U15.5 U15.6 U15.7 U15.8

## Silkscreen, mask and mechanical layers (free items; w line width, h text height)
Top Overlay:
  text "IO7" at 1805,1912.93 h20 r225
  text "IO6 ~" at 1905,1912.93 h20 r225
  text "IO5 ~" at 2005,1912.93 h20 r225
  text "IO4" at 2105,1912.93 h20 r225
  text "IO3 ~" at 2205,1912.93 h20 r225
  text "IO2" at 2305,1912.93 h20 r225
  text "IO1" at 2405,1912.93 h20 r225
  text "IO0" at 2505,1912.93 h20 r225
  text "IO10 ~" at 1440,1910 h20 r225
  text "IO9 ~" at 1540,1910 h20 r225
  text "IO8" at 1640,1910 h20 r225
  text "SDA" at 840,1907.93 h20 r225
  text "SCL" at 740,1902.93 h20 r225
  text "AREF" at 940,1902.93 h20 r225
  text "GND" at 1040,1902.93 h20 r225
  text "IO13" at 1140,1902.93 h20 r225
  text "IO12" at 1240,1902.93 h20 r225
  text "IO11 ~" at 1340,1902.93 h20 r225
  text "IOREF" at 1195,187.07 h20 r45
  text "RESET" at 1300,187.07 h20 r45
  text "3v3" at 1400,187.07 h20 r45
  text "5v" at 1500,187.07 h20 r45
  text "GND" at 1600,187.07 h20 r45
  text "GND" at 1700,187.07 h20 r45
  text "Vin" at 1800,187.07 h20 r45
  text "AD0" at 2000,187.07 h20 r45
  text "AD1" at 2100,187.07 h20 r45
  text "AD2" at 2200,187.07 h20 r45
  text "AD3" at 2300,187.07 h20 r45
  text "AD4" at 2400,187.07 h20 r45
  text "AD5" at 2500,187.07 h20 r45
  text "RESET" at 1295,-2515 h20 r45
  text "3v3" at 1395,-2515 h20 r45
  text "5v" at 1495,-2515 h20 r45
  text "GND" at 1595,-2515 h20 r45
  text "GND" at 1695,-2515 h20 r45
  text "Vin" at 1795,-2515 h20 r45
Mechanical 1:
  circle w5: c2600,1400 r62.99
  circle w5: c550,100 r62.99
  circle w5: c2600,300 r62.99
  circle w5: c600,2000 r62.99
  lines w5: 0,0 2600,0 2600,50 2700,150 2700,1500 2600,1600 2600,2000 2500,2100 0,2100 0,0